# EAGLE board 25062016wearable_v1.2 - components placed (EAGLE 7.6.0)

Size 60.25 x 54.78 mm. Coordinates in mm from the lower left corner, seen from the top.
Outline: 0.03,0 60.16,0.1 60.25,54.63 0,54.78 0.03,0
Copper layers (1*16): Top 0.035mm / dielectric 1.5mm / Bottom 0.035mm
Design rules "default *": minimum track width 10mil, minimum drill 24mil, track to track 0.4mm, track to pad 0.4mm, pad to pad 0.4mm, via to via 0.4mm, smd to smd 0.4mm, copper to edge 40mil, drill to drill 8mil, minimum pad ring 10mil, minimum via ring 0.3mm, stop-mask expansion 4mil, vias tented up to drill 0mil, thermal gap 10mil
Net classes: 0 default: width 0.61 mm, clearance 0.3 mm; 1 GND: width 0.61 mm, clearance 0.3 mm; 2 3.3: width 0.61 mm, clearance 0.3 mm

## Footprints (pad centres in the part's own frame; a part is rotated, then mirrored left to right if it is on the bottom)
MA03-1 = drill 1.016 long: 1 -2.54,0; 2 0,0; 3 2.54,0
C2.5-2 = drill 0.813 pad 1.6 octagon: 1 -1.27,0; 2 1.27,0
SOT23 = smd 1 x 1.4: 1 -0.95,-1.1; 2 0.95,-1.1; 3 0,1.1
SOIC-8 = smd 0.66 x 2.032: 1 -1.905,-3.073; 2 -0.635,-3.073; 3 0.635,-3.073; 4 1.905,-3.073; 5 1.905,3.073; 6 0.635,3.073; 7 -0.635,3.073; 8 -1.905,3.073
TEENSY3-OUTER_ROW = drill 0.965: 0 -7.62,13.97; 1 -7.62,11.43; 2 -7.62,8.89; 3 -7.62,6.35; 3.3V 7.62,11.43; 3.3V1 -2.54,-16.51; 4 -7.62,3.81; 5 -7.62,1.27; 6 -7.62,-1.27; 7 -7.62,-3.81; 8 -7.62,-6.35; 9 -7.62,-8.89; 10 -7.62,-11.43; 11 -7.62,-13.97; 12 -7.62,-16.51; 13 7.62,-16.51; 14/A0 7.62,-13.97; 15/A1 7.62,-11.43; 16/A2 7.62,-8.89; 17/A3 7.62,-6.35; 18/A4 7.62,-3.81; 19/A5 7.62,-1.27; 20/A6 7.62,1.27; 21/A7 7.62,3.81; 22/A8 7.62,6.35; 23/A9 7.62,8.89; AGND 7.62,13.97; GND -7.62,16.51; GND1 0,-16.51; PGM 2.54,-16.51; RESET/DAC 5.08,-16.51; VBAT -5.08,-16.51; VIN 7.62,16.51
LED5MMRGB = drill 0.8 pad 0.813 octagon: P$1 -1.905,0.714; P$2 -0.635,-0.714; P$4 1.905,-0.714 | drill 0.8 pad 0.813: P$3 0.635,0.714
LSP10 = drill 1.016 pad 2.159 octagon: MP 0,0
05PA = drill 0.914 long: 1 -5.08,0; 2 -2.54,0; 3 0,0; 4 2.54,0; 5 5.08,0
MA04-2 = drill 1.016 octagon: 1 -3.81,-1.27; 2 -3.81,1.27; 3 -1.27,-1.27; 4 -1.27,1.27; 5 1.27,-1.27; 6 1.27,1.27; 7 3.81,-1.27; 8 3.81,1.27
0204/7 = drill 0.813 octagon: 1 -3.81,0; 2 3.81,0
0207/2V = drill 0.813 octagon: 1 -1.27,0; 2 1.27,0
SMS-002 = smd 1.092 x 2.007: 1 -1.27,-4.496; 2 1.27,-4.496; 3 1.27,4.496; 4 -1.27,4.496
MICROSD_MICROSD = smd 0.8 x 1.5: 1 -1.94,2.7; 2 -0.84,2.3; 3 0.26,2.7; 4 1.36,2.9; 5 2.46,2.7; 6 3.56,2.9; 7 4.66,2.7; 8 5.76,2.7 | smd 1.4 x 1.9: NC -6.85,6.55; NC3 6.55,5.55 | smd 1.8 x 1.4: NC1 -0.75,-7.6; NC2 4.95,-7.6
SE11 = drill 1.118 pad 2.159 octagon: MP 0,0

## Placement (x,y rotation side)
BAT  [MA03-1]  50,13.05 0 top
C1  0.1u  [C2.5-2]  30.64,14.97 180 top
C2  0.1u  [C2.5-2]  25.77,43.03 0 top
D1  BAT54C  [SOT23]  49.81,17.92 0 bottom
IC1  NCS2211  [SOIC-8]  29.54,34.59 180 bottom
IC2  TEENSY_3.1_OUTER_ROW  [TEENSY3-OUTER_ROW]  29.24,26.67 0 top
LED1  5MMRGBLED  [LED5MMRGB]  8.64,48 180 top
LS+  LSP10  [LSP10]  31.75,28.02 0 top
LS-  LSP10  [LSP10]  27,28.2 0 top
MIC_IN  [05PA]  49.9,41.56 0 top
NRF24  [MA04-2]  13.95,29.48 0 top
R1  20k  [0204/7]  24.31,16.65 90 top
R2  100  [0207/2V]  5.66,38.45 270 top
R3  100  [0207/2V]  17.12,38.37 270 top
R4  100  [0207/2V]  11.22,38.37 270 top
R5  10k  [0207/2V]  48.15,23.03 270 top
R6  10k  [0207/2V]  51.63,23.11 270 top
S1  SWS002  [SMS-002]  49.84,31.99 0 bottom
SD1  MICROSD_SF-MICROSD  [MICROSD_MICROSD]  11.36,14.49 180 bottom
SW_IN1  SE11  [SE11]  53.34,18.8 0 top
SW_IN2  SE11  [SE11]  33.36,42.67 0 top
TRIMMER20K  [0207/2V]  34.17,33.38 270 top
USB5V  LSP10  [LSP10]  46.14,16.74 0 top

## Library data of the parts
BAT NRF24 = con-lstb; OC_FARNELL: unknown; OC_NEWARK: unknown
C1 C2 = capacitor-wima
D1 = diode
IC1 = NCS2211
IC2 = Teensy_3_and_LC_Series_Boards_v1.1
LED1 = led_rgb
LS+ LS- SW_IN1 SW_IN2 USB5V = solpad
MIC_IN = con-amp-quick; OC_FARNELL: unknown; OC_NEWARK: unknown
R1-R6 TRIMMER20K = rcl
S1 = smd-special
SD1 = sd

## Nets
3.3 [3.3]: IC2.3.3V IC2.3.3V1 MIC_IN.4 NRF24.2 R5.2 SD1.4
5V [3.3]: BAT.1 D1.2 USB5V.MP
AGND: IC2.AGND
AR: MIC_IN.1
AUDIOEN: IC1.1 IC2.0
AUDIOIN: IC2.15/A1 MIC_IN.2
AUDIOOUT: C1.1 IC2.RESET/DAC
BLUE: IC2.16/A2 R3.2
CSN: IC2.6 NRF24.4
GAIN: MIC_IN.3 S1.3 S1.4
GND [GND]: BAT.2 C2.1 IC1.7 IC2.GND IC2.GND1 LED1.P$3 MIC_IN.5 NRF24.1 R6.2 SD1.6
GREEN: IC2.17/A3 R4.2
IRQ: NRF24.8
MISO: IC2.12 NRF24.7 SD1.7
MOSI: IC2.11 NRF24.6 SD1.3
N$1: D1.3 SW_IN1.MP
N$2: IC1.5 LS+.MP TRIMMER20K.2
N$3: IC1.3 R1.2 TRIMMER20K.1
N$4: C1.2 R1.1
N$5: C2.2 IC1.2 IC1.4
N$6: IC1.8 LS-.MP
N$7: LED1.P$4 R2.1
N$8: LED1.P$1 R4.1
N$9: LED1.P$2 R3.1
N$11: R5.1 S1.2
N$12: R6.1 S1.1
PGM: IC2.PGM
PIN1: IC2.1
PIN2: IC2.2
PIN3: IC2.3
PIN7: IC2.7
PIN8: IC2.8
PIN9: IC2.9
PIN10: IC2.10
PIN14: IC2.14/A0
PIN18: IC2.18/A4
PIN19: IC2.19/A5
PIN21: IC2.21/A7
PIN22: IC2.22/A8
PIN23: IC2.23/A9
RED: IC2.20/A6 R2.2
RFCE: IC2.5 NRF24.3
SCK: IC2.13 NRF24.5 SD1.5
SDCE: IC2.4 SD1.2
VBAT [3.3]: BAT.3 D1.1
VBATAUX: IC2.VBAT
VCC: IC1.6 IC2.VIN SW_IN2.MP

## Tracks (layer width: path | path; a pad name or v marks a point on that pad's centre or on a via)
3.3  (5 unrouted)
5V  (2 unrouted)
AUDIOEN  (1 unrouted)
AUDIOIN  (1 unrouted)
AUDIOOUT  (1 unrouted)
BLUE  (1 unrouted)
CSN  (1 unrouted)
GAIN  (2 unrouted)
GND  (9 unrouted)
GREEN  (1 unrouted)
MISO  (2 unrouted)
MOSI  (2 unrouted)
N$1  (1 unrouted)
N$2  (2 unrouted)
N$3  (2 unrouted)
N$4  (1 unrouted)
N$5  (2 unrouted)
N$6  (1 unrouted)
N$7  (1 unrouted)
N$8  (1 unrouted)
N$9  (1 unrouted)
N$11  (1 unrouted)
N$12  (1 unrouted)
RED  (1 unrouted)
RFCE  (1 unrouted)
SCK  (2 unrouted)
SDCE  (1 unrouted)
VBAT  (1 unrouted)
VCC  (2 unrouted)